# EAGLE board MARI_BRD (EAGLE 9.7.0)
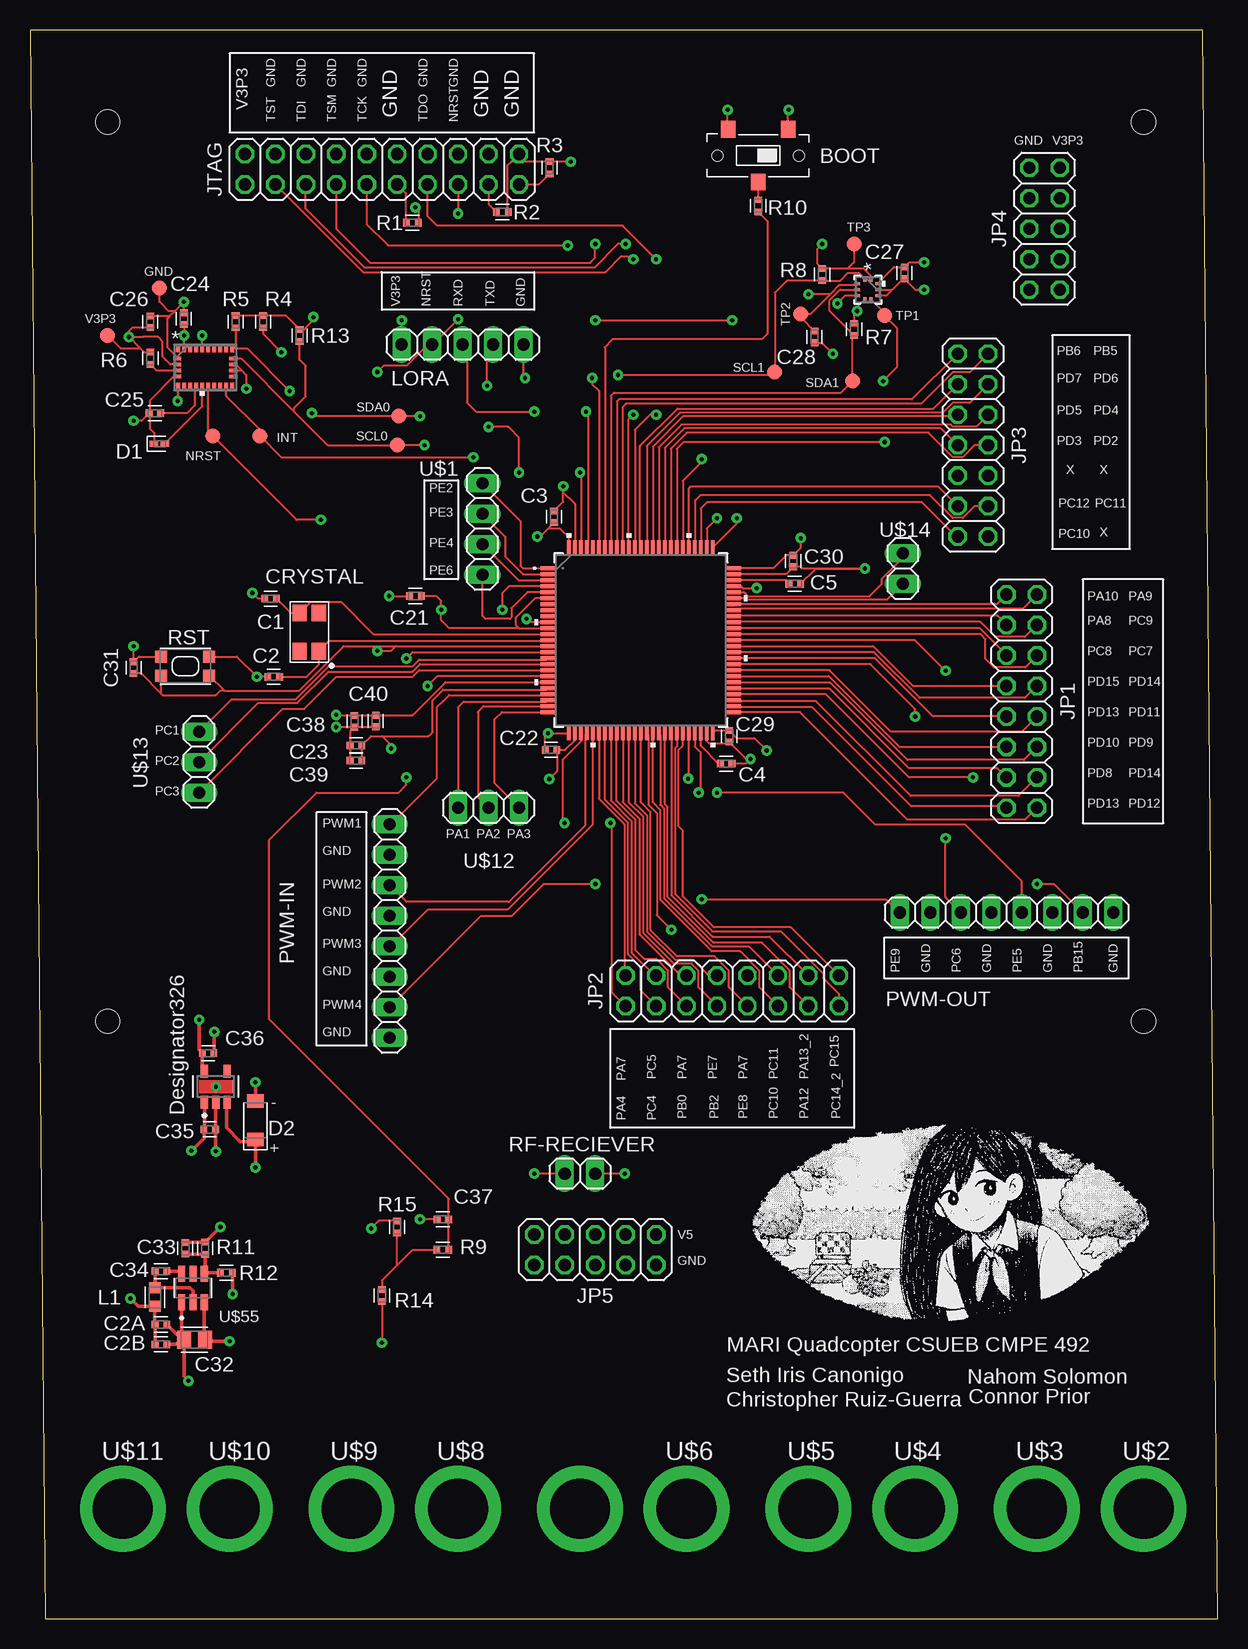
[diagram p0: board, top side]
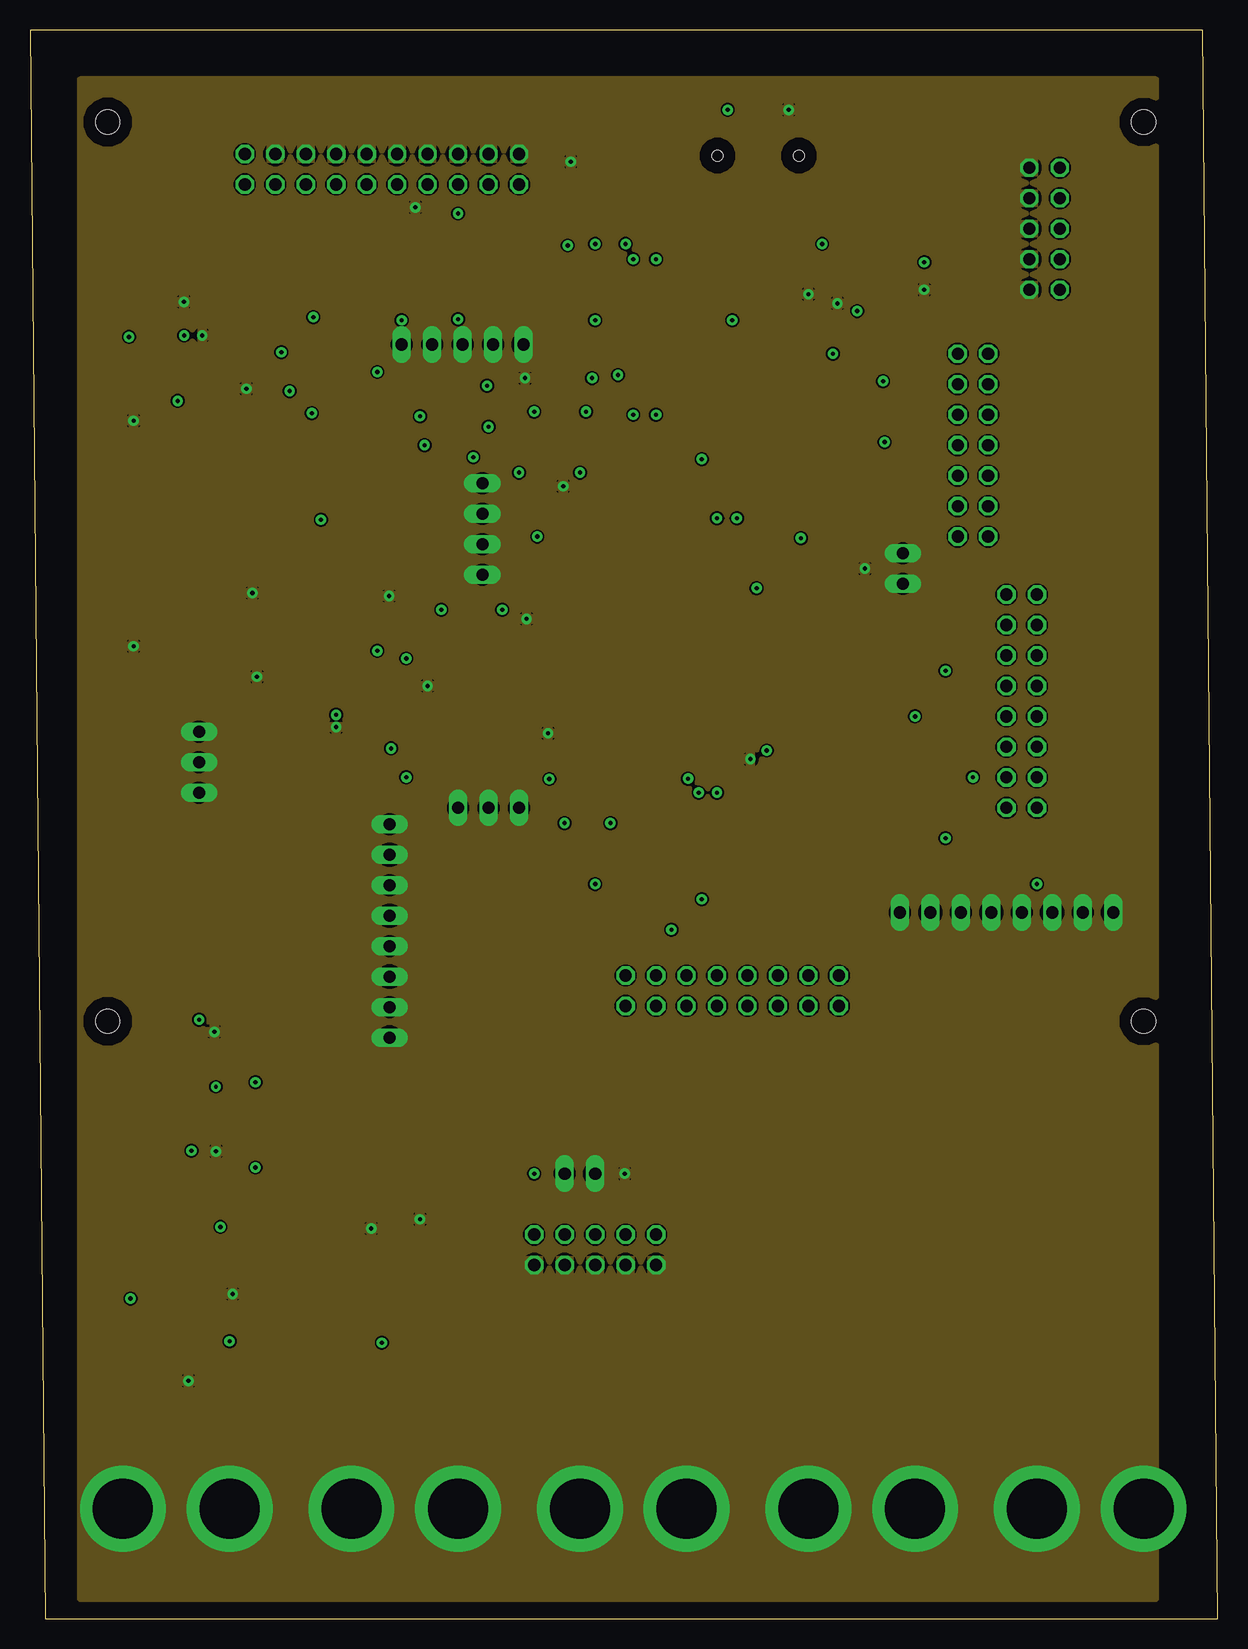
[diagram p1: board, inner layer GND]
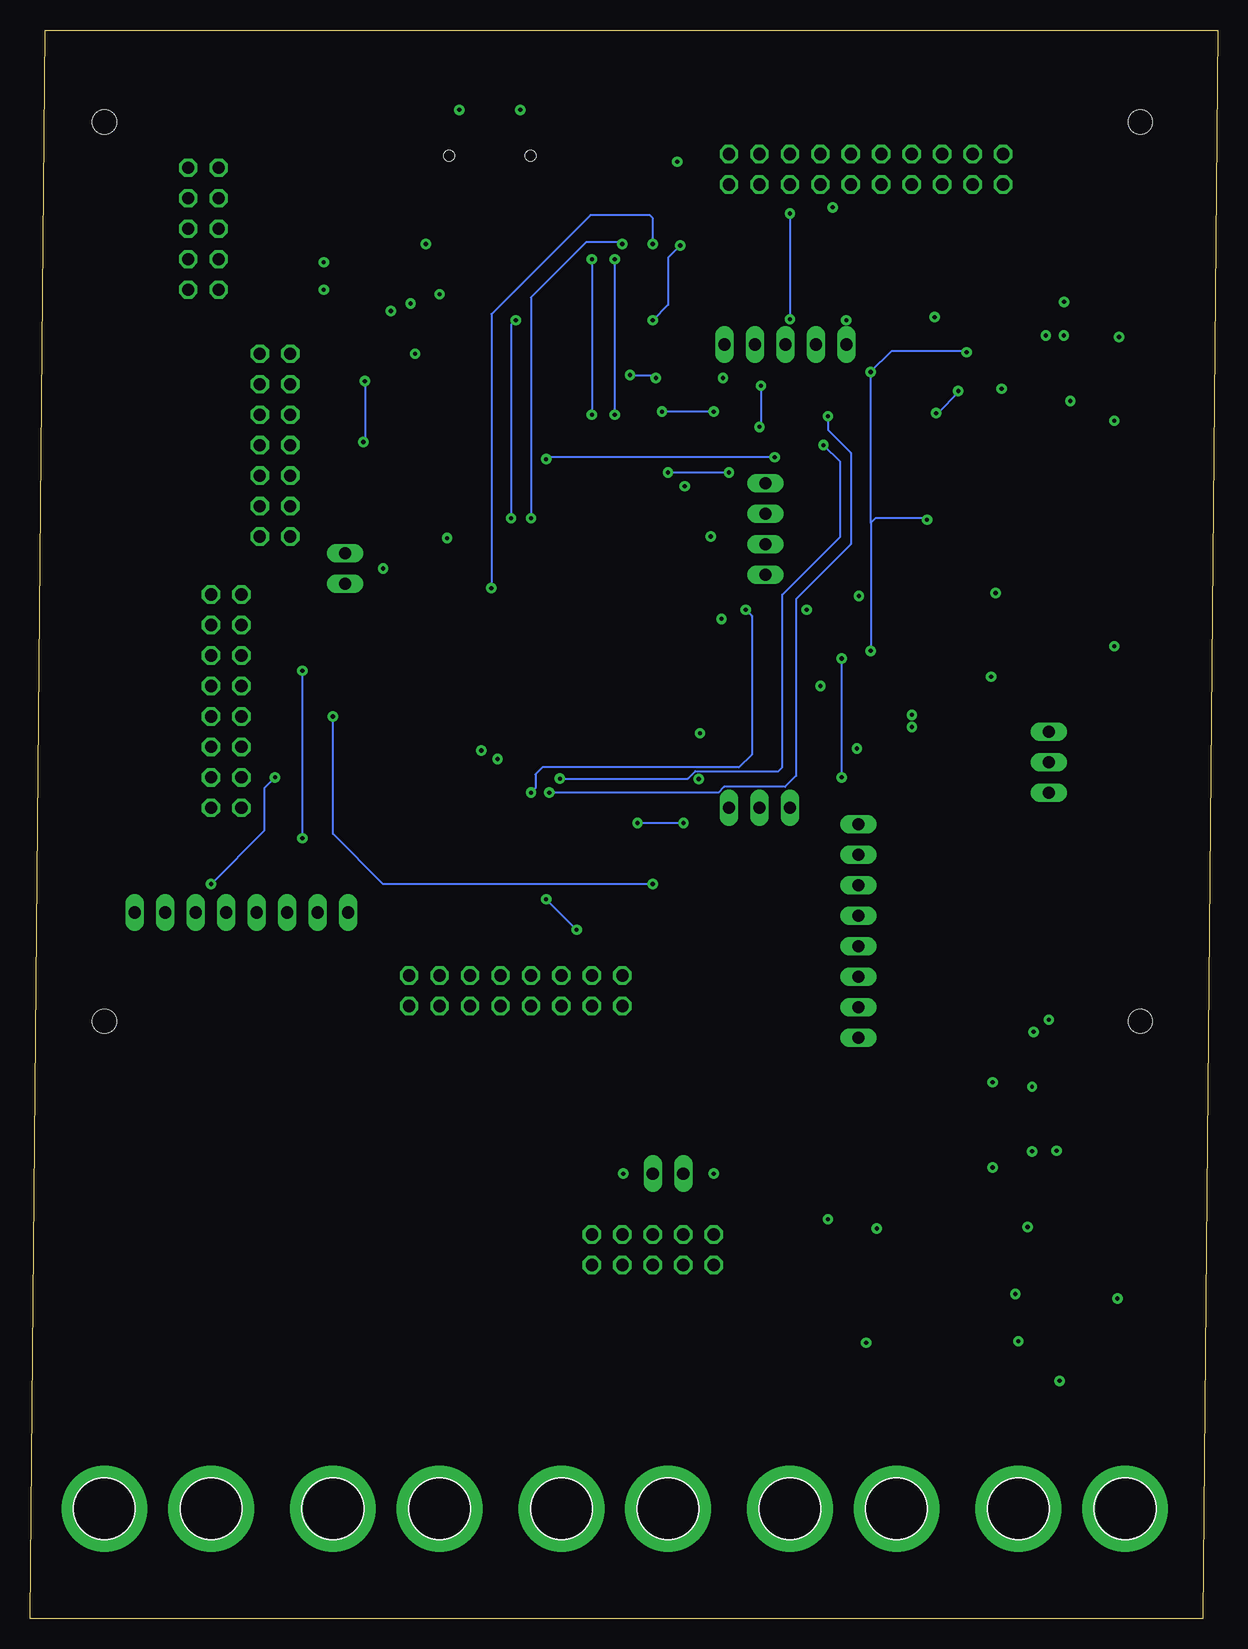
[diagram p2: board, bottom side, seen from below]

Size 99.04 x 132.38 mm. Coordinates in mm from the lower left corner, seen from the top.
Outline: 1.27,0 99.04,0 97.77,132.38 0,132.38 1.27,0
Copper layers (1*2*63*16): Top / GND / Bottom / layer 63
Stack-up Default Layer Stack: Top User Defined 0.035559375mm / Dielectric-2 User Defined 1.5748mm / GND User Defined 0.035559375mm / Dielectric-1 User Defined 1.5748mm / VDD User Defined 0.035559375mm / Dielectric-3 User Defined 1.5748mm / Bottom User Defined 0.035559375mm
Design rules: minimum copper width 6mil, minimum drill size 8mil, copper clearance wire_polygon to wire_polygon 6mil, copper clearance wire_polygon to pad_smd 6mil, copper clearance wire_polygon to via 6mil, copper clearance pad_smd to pad_smd 6mil, copper clearance pad_smd to via 6mil, copper clearance via to via 6mil, copper clearance smd to pad (same net) 6mil, copper clearance smd to via (same net) 6mil, copper clearance smd to smd (same net) 6mil, dimension clearance 40mil, via restrict clearance 0mil, restrict clearance 0mil, drill distance 20mil, keepout clearance 0mil
Holes 2 mm at 92.84,124.71 6.48,124.71 6.48,49.78 92.84,49.78

## Footprints (pad centres in the part's own frame; a part is rotated, then mirrored left to right if it is on the bottom)
10LGA_2X2X0P75_BOS = smd 0.279 x 0.254: 1 -0.787,0.25; 2 -0.787,-0.25; 6 0.787,-0.25; 7 0.787,0.25 | smd 0.254 x 0.279: 3 -0.5,-0.787; 4 0,-0.787; 5 0.5,-0.787; 8 0.5,0.787; 9 0,0.787; 10 -0.5,0.787
CL-SB-12B-01T = smd 1.2 x 1.4: 1 -2.5,-2.2; 3 2.5,-2.2; C 0,2.2 | hole 0.9: -3.4,0; 3.4,0
CAPC1005X60 = smd 0.56 x 0.629: 1 -0.485,0; 2 0.485,0
CAPC2012X110 = smd 1.165 x 1.465: 1 -0.875,0; 2 0.875,0
STDCRG1-16M = smd 1.4 x 1.2: P$1 -2.2,-1.6; P$2 1,-1.6; P$3 1,0; P$4 -2.2,0
LEDC1005X25N_FLAT-R = smd 0.7 x 0.5: A 0.45,0; C -0.45,0
SODFL3718X115 = smd 1.115 x 1.361: 1 -1.6,0; 2 1.6,0
B1,27 = smd 1.27 x 1.27: TP 0,0
2X08 = drill 1.016 octagon: 1 -8.89,-1.27; 2 -8.89,1.27; 3 -6.35,-1.27; 4 -6.35,1.27; 5 -3.81,-1.27; 6 -3.81,1.27; 7 -1.27,-1.27; 8 -1.27,1.27; 9 1.27,-1.27; 10 1.27,1.27; 11 3.81,-1.27; 12 3.81,1.27; 13 6.35,-1.27; 14 6.35,1.27; 15 8.89,-1.27; 16 8.89,1.27
2X07 = drill 1.016 octagon: 1 -7.62,-1.27; 2 -7.62,1.27; 3 -5.08,-1.27; 4 -5.08,1.27; 5 -2.54,-1.27; 6 -2.54,1.27; 7 0,-1.27; 8 0,1.27; 9 2.54,-1.27; 10 2.54,1.27; 11 5.08,-1.27; 12 5.08,1.27; 13 7.62,-1.27; 14 7.62,1.27
2X05 = drill 1.016 octagon: 1 -5.08,-1.27; 2 -5.08,1.27; 3 -2.54,-1.27; 4 -2.54,1.27; 5 0,-1.27; 6 0,1.27; 7 2.54,-1.27; 8 2.54,1.27; 9 5.08,-1.27; 10 5.08,1.27
2X10 = drill 1.016 octagon: 1 -11.43,-1.27; 2 -11.43,1.27; 3 -8.89,-1.27; 4 -8.89,1.27; 5 -6.35,-1.27; 6 -6.35,1.27; 7 -3.81,-1.27; 8 -3.81,1.27; 9 -1.27,-1.27; 10 -1.27,1.27; 11 1.27,-1.27; 12 1.27,1.27; 13 3.81,-1.27; 14 3.81,1.27; 15 6.35,-1.27; 16 6.35,1.27; 17 8.89,-1.27; 18 8.89,1.27; 19 11.43,-1.27; 20 11.43,1.27
INDC1608X95N = smd 0.9 x 0.97: 1 -0.785,0 | smd 0.933 x 0.97: 2 0.769,0
1X05 = drill 1.016 long: 1 -5.08,0; 2 -2.54,0; 3 0,0; 4 2.54,0; 5 5.08,0
1X08 = drill 1.016 long: 1 -8.89,0; 2 -6.35,0; 3 -3.81,0; 4 -1.27,0; 5 1.27,0; 6 3.81,0; 7 6.35,0; 8 8.89,0
RESC1005X40 = smd 0.535 x 0.644: 1 -0.507,0; 2 0.507,0
1X02 = drill 1.016 long: 1 -1.27,0; 2 1.27,0
KMR2 = smd 1 x 1: 1 2,0.8; 2 2,-0.8; 3 -2,-0.8; 4 -2,0.8
QFN_BNO055_BOS = smd 0.305 x 0.533: 1 -2.25,1.537; 6 -2.25,-1.537; 7 -1.75,-1.537; 8 -1.25,-1.537; 9 -0.75,-1.537; 10 -0.25,-1.537; 11 0.25,-1.537; 12 0.75,-1.537; 13 1.25,-1.537; 14 1.75,-1.537; 15 2.25,-1.537; 20 2.25,1.537; 21 1.75,1.537; 22 1.25,1.537; 23 0.75,1.537; 24 0.25,1.537; 25 -0.25,1.537; 26 -0.75,1.537; 27 -1.25,1.537; 28 -1.75,1.537 | smd 0.432 x 0.305: 2 -2.235,0.75; 3 -2.235,0.25; 4 -2.235,-0.25; 5 -2.235,-0.75; 16 2.235,-0.75; 17 2.235,-0.25; 18 2.235,0.25; 19 2.235,0.75
LQFP-100_14X14MM_STM = smd 1.2 x 0.3: 1 -7.75,6; 2 -7.75,5.5; 3 -7.75,5; 4 -7.75,4.5; 5 -7.75,4; 6 -7.75,3.5; 7 -7.75,3; 8 -7.75,2.5; 9 -7.75,2; 10 -7.75,1.5; 11 -7.75,1; 12 -7.75,0.5; 13 -7.75,0; 14 -7.75,-0.5; 15 -7.75,-1; 16 -7.75,-1.5; 17 -7.75,-2; 18 -7.75,-2.5; 19 -7.75,-3; 20 -7.75,-3.5; 21 -7.75,-4; 22 -7.75,-4.5; 23 -7.75,-5; 24 -7.75,-5.5; 25 -7.75,-6; 51 7.75,-6; 52 7.75,-5.5; 53 7.75,-5; 54 7.75,-4.5; 55 7.75,-4; 56 7.75,-3.5; 57 7.75,-3; 58 7.75,-2.5; 59 7.75,-2; 60 7.75,-1.5; 61 7.75,-1; 62 7.75,-0.5; 63 7.75,0; 64 7.75,0.5; 65 7.75,1; 66 7.75,1.5; 67 7.75,2; 68 7.75,2.5; 69 7.75,3; 70 7.75,3.5; 71 7.75,4; 72 7.75,4.5; 73 7.75,5; 74 7.75,5.5; 75 7.75,6 | smd 0.3 x 1.2: 26 -6,-7.75; 27 -5.5,-7.75; 28 -5,-7.75; 29 -4.5,-7.75; 30 -4,-7.75; 31 -3.5,-7.75; 32 -3,-7.75; 33 -2.5,-7.75; 34 -2,-7.75; 35 -1.5,-7.75; 36 -1,-7.75; 37 -0.5,-7.75; 38 0,-7.75; 39 0.5,-7.75; 40 1,-7.75; 41 1.5,-7.75; 42 2,-7.75; 43 2.5,-7.75; 44 3,-7.75; 45 3.5,-7.75; 46 4,-7.75; 47 4.5,-7.75; 48 5,-7.75; 49 5.5,-7.75; 50 6,-7.75; 76 6,7.75; 77 5.5,7.75; 78 5,7.75; 79 4.5,7.75; 80 4,7.75; 81 3.5,7.75; 82 3,7.75; 83 2.5,7.75; 84 2,7.75; 85 1.5,7.75; 86 1,7.75; 87 0.5,7.75; 88 0,7.75; 89 -0.5,7.75; 90 -1,7.75; 91 -1.5,7.75; 92 -2,7.75; 93 -2.5,7.75; 94 -3,7.75; 95 -3.5,7.75; 96 -4,7.75; 97 -4.5,7.75; 98 -5,7.75; 99 -5.5,7.75; 100 -6,7.75
DYD0005A-MFG = smd 1.1 x 0.6: 1 -1.3,0.95; 2 -1.3,0; 3 -1.3,-0.95; 4 1.3,-0.95; 5 1.3,0.95 | drill 0.3 pad 0.813: 8 0,0
1X04 = drill 1.016 long: 1 -3.81,0; 2 -1.27,0; 3 1.27,0; 4 3.81,0
4MM_PLUG = drill 5 pad 7.15: P$1 0,-1.27
1X03 = drill 1.016 long: 1 -2.54,0; 2 0,0; 3 2.54,0
SOT95P280X100-6N = smd 1.34 x 0.59: 1 -1.19,0.95; 2 -1.19,0; 3 -1.19,-0.95; 4 1.19,-0.95; 5 1.19,0; 6 1.19,0.95

## Placement (x,y rotation side)
BMP390  BMP39010LGA_2X2X0P75_BOS  [10LGA_2X2X0P75_BOS]  69.85,110.74 270 top
BOOT  SPDT_SWITCH_CL-SB-12B-01T  [CL-SB-12B-01T]  60.71,121.92 180 top
C1  15pF  [CAPC1005X60]  20.07,84.99 180 top
C2  15pF  [CAPC1005X60]  20.32,78.49 180 top
C2A  22 µF  [CAPC1005X60]  10.92,24.51 0 top
C2B  22 µF  [CAPC1005X60]  10.92,22.86 0 top
C3  100nF  [CAPC1005X60]  43.69,91.82 90 top
C4  2.2uF  [CAPC1005X60]  58.04,71.25 0 top
C5  2.2uF  [CAPC1005X60]  63.75,86.23 0 top
C21  100nF  [CAPC1005X60]  32.13,85.22 180 top
C22  100nF  [CAPC1005X60]  43.43,72.39 180 top
C23  1uF  [CAPC1005X60]  27.18,72.77 0 top
C24  120 nF  [CAPC1005X60]  12.83,108.33 270 top
C25  1uF  [CAPC1005X60]  10.41,100.46 0 top
C26  100nF  [CAPC1005X60]  10.03,108.08 270 top
C27  100nF  [CAPC1005X60]  72.9,112.14 90 top
C28  100nF  [CAPC1005X60]  65.41,106.81 270 top
C29  100nF  [CAPC1005X60]  58.29,73.53 270 top
C30  100nF  [CAPC1005X60]  63.63,88.14 270 top
C31  100nF  [CAPC1005X60]  8.64,79.25 90 top
C32  10 uF  [CAPC2012X110]  13.72,23.24 0 top
C33  100 pF  [CAPC1005X60]  12.95,30.86 90 top
C34  100 nF  [CAPC1005X60]  10.92,28.96 0 top
C35  1 µF  [CAPC1005X60]  14.99,40.77 180 top
C36  1 µF  [CAPC1005X60]  14.86,47.12 180 top
C37  100 nF  [CAPC1005X60]  34.42,33.27 180 top
C38  100nF  [CAPC1005X60]  27.05,74.77 270 top
C39  100nF  [CAPC1005X60]  27.18,71.5 0 top
C40  1uF  [CAPC1005X60]  28.83,74.8 90 top
CRYSTAL  16 MHz  [STDCRG1-16M]  22.48,82.8 90 top
D1  CHIP-FLAT-R_0402  [LEDC1005X25N_FLAT-R]  10.8,97.92 0 top
D2  SCHOTTKY_MBR0520LT1GDO-219  [SODFL3718X115]  18.8,41.53 90 top
GND  TPB1,27  [B1,27]  10.8,110.87 0 top
INT  TPB1,27  [B1,27]  19.18,98.55 0 top
JP1  PINHD-2X8  [2X08]  82.68,76.45 90 top
JP2  PINHD-2X8  [2X08]  58.55,52.32 0 top
JP3  PINHD-2X7  [2X07]  78.61,97.79 270 top
JP4  PINHD-2X5  [2X05]  84.58,115.82 90 top
JP5  PINHD-2X5  [2X05]  47.12,30.73 180 top
JTAG  PINHD-2X10  [2X10]  29.34,120.78 0 top
L1  3.3 µH  [INDC1608X95N]  10.41,26.8 270 top
LORA  FEMALE-HEADER-1X5  [1X05]  36.07,106.17 0 top
NRST  TPB1,27  [B1,27]  15.24,98.55 0 top
PWM-IN  PINHD-1X08_1X08M  [1X08]  29.98,57.31 270 top
PWM-OUT  PINHD-1X08_1X08M  [1X08]  81.41,58.84 0 top
R1  10K  [RESC1005X40]  31.88,116.33 0 top
R2  10K  [RESC1005X40]  39.37,117.22 0 top
R3  10K  [RESC1005X40]  43.31,120.9 90 top
R4  10K  [RESC1005X40]  19.43,108.08 90 top
R5  40K  [RESC1005X40]  17.15,108.08 90 top
R6  10K  [RESC1005X40]  10.03,105.03 270 top
R7  4.7K  [RESC1005X40]  68.71,107.44 270 top
R8  4.7K  [RESC1005X40]  66.04,112.01 270 top
R9  1 kΩ  [RESC1005X40]  34.42,30.73 0 top
R10  10k  [RESC1005X40]  60.71,117.73 90 top
R11  56.2 kΩ  [RESC1005X40]  14.61,30.86 90 top
R12  10 kΩ  [RESC1005X40]  16.38,28.83 180 top
R13  40K  [RESC1005X40]  22.48,106.93 90 top
R14  47.5 kΩ  [RESC1005X40]  29.34,26.92 270 top
R15  4.99 kΩ  [RESC1005X40]  30.61,32.64 270 top
RF-RECIEVER  PINHD-1X02_1X02M  [1X02]  45.85,37.08 0 top
RST  SPST-NO_SWITCH_KMR2  [KMR2]  12.95,79.38 0 top
SCL0  TPB1,27  [B1,27]  30.61,97.79 0 top
SCL1  TPB1,27  [B1,27]  62.1,103.89 0 top
SDA0  TPB1,27  [B1,27]  30.76,100.2 0 top
SDA1  TPB1,27  [B1,27]  68.58,103.12 0 top
TP1  TPB1,27  [B1,27]  71.25,108.58 0 top
TP2  TPB1,27  [B1,27]  64.26,108.71 0 top
TP3  TPB1,27  [B1,27]  68.71,114.55 0 top
U1  [QFN_BNO055_BOS]  14.61,104.27 0 top
U3  STM32F756VGT6LQFP-100_14X14MM_STM  [LQFP-100_14X14MM_STM]  50.93,81.53 0 top
U33  TLV75533PDYDRDYD0005A-MFG  [DYD0005A-MFG]  15.49,44.32 90 top
U$1  PINHD-1X04_1X04M  [1X04]  37.72,90.8 270 top
U$2  VDD  [4MM_PLUG]  92.84,7.87 180 bottom
U$3  VSS  [4MM_PLUG]  83.95,7.87 180 bottom
U$4  VDD  [4MM_PLUG]  73.79,7.87 180 bottom
U$5  VSS  [4MM_PLUG]  64.9,7.87 180 bottom
U$6  VDD  [4MM_PLUG]  54.74,7.87 180 bottom
U$7  VSS  [4MM_PLUG]  45.85,7.87 180 bottom
U$8  VDD  [4MM_PLUG]  35.69,7.87 180 bottom
U$9  VSS  [4MM_PLUG]  26.8,7.87 180 bottom
U$10  VDD  [4MM_PLUG]  16.64,7.87 180 bottom
U$11  VSS  [4MM_PLUG]  7.75,7.87 180 bottom
U$12  PINHD-1X03_1X03M  [1X03]  38.23,67.56 0 top
U$13  PINHD-1X03_1X03M  [1X03]  14.1,71.37 270 top
U$14  PINHD-1X02_1X02M  [1X02]  72.77,87.5 270 top
U$55  AP62300TWU-7  [SOT95P280X100-6N]  13.59,27.56 90 top
V3P3  TPB1,27  [B1,27]  6.48,106.93 0 top

## Library data of the parts
BMP390 = BMP390; COPYRIGHT: Copyright (C) 2025 Ultra Librarian. All rights reserved.; MANUFACTURER_NAME: Bosch Sensortec; MANUFACTURER_PART_NUMBER: BMP390
BOOT = Switch; CATEGORY: Switches; DATASHEET: https://www.nidec-components.com/e/catalog/switch/cl-sb.pdf; DESCRIPTION: Slide Switch SPDT Surface Mount; MANUFACTURER: Nidec Components Corporation; MPN: CL-SB-12B-01T; OPERATING_TEMPERATURE: -40°C ~ 85°C; PACKAGE_SIZE: NA; PACKAGE_TYPE: Surface Mount; PART_STATUS: Active; ROHS: Compliant; SERIES: CL-SB; SUBCATEGORY: Slide Switches; TYPE: SPDT
C1 C2 C2A C2B C3-C5 C21-C31 C33-C40 = Capacitor; CATEGORY: Capacitor; PACKAGE_SIZE: 0402; PACKAGE_TYPE: Surface Mount; SUBCATEGORY: Ceramic Capacitors; TYPE: MLCC
C32 = Capacitor; CATEGORY: Capacitor; PACKAGE_SIZE: 0805; PACKAGE_TYPE: Surface Mount; SUBCATEGORY: Ceramic Capacitors; TYPE: MLCC
CRYSTAL = STDCRG1-16M
D1 = LED; CATEGORY: LED; COLOR: Red; DESCRIPTION: Red LED Indication 0402 (1005 Metric); PACKAGE_SIZE: 0402; PACKAGE_TYPE: Surface Mount; SUBCATEGORY: Chip LED; TYPE: Square with Flat Top
D2 = Diode; CATEGORY: Diode; DATASHEET: https://www.onsemi.com/download/data-sheet/pdf/mbr0520lt1-d.pdf; DESCRIPTION: Diode 20 V 500mA Surface Mount SOD-123; FORWARD_CURRENT: 500mA; FORWARD_VOLTAGE: 385mV; MANUFACTURER: onsemi; MPN: MBR0520LT1G; OPERATING_TEMPERATURE: -65°C ~ 125°C; PACKAGE_SIZE: SOD-123; PACKAGE_TYPE: Surface Mount; PART_STATUS: Active; REVERSE_VOLTAGE: 20V; ROHS: Compliant; SERIES: MBR0520; SUBCATEGORY: Schottky Diodes; TYPE: Schottky Power Rectifier; ZENER_VOLTAGE: NA
GND INT NRST SCL0 SCL1 SDA0 SDA1 TP1-TP3 V3P3 = testpad
JP1 JP2 = Connector; CATEGORY: Connectors; DESCRIPTION: Header-Straight-2x8 Position; PACKAGE_TYPE: Through Hole; PITCH: 0.100" (2.54mm); SUBCATEGORY: Headers; TYPE: Male Pins
JP3 = Connector; CATEGORY: Connectors; DESCRIPTION: Header-Straight-2x7 Position; PACKAGE_TYPE: Through Hole; PITCH: 0.100" (2.54mm); SUBCATEGORY: Headers; TYPE: Male Pins
JP4 JP5 = Connector; CATEGORY: Connectors; DESCRIPTION: Header-Straight-2x5 Position; PACKAGE_TYPE: Through Hole; PITCH: 0.100" (2.54mm); SUBCATEGORY: Headers; TYPE: Male Pins
JTAG = Connector; CATEGORY: Connectors; DESCRIPTION: Header-Straight-2x10 Position; PACKAGE_TYPE: Through Hole; PITCH: 0.100" (2.54mm); SUBCATEGORY: Headers; TYPE: Male Pins
L1 = Inductor; CATEGORY: Inductors; DESCRIPTION: Chip 1.60 X 0.80 X 0.95 mm body 0603(1608-METRIC); PACKAGE_SIZE: 0603; PACKAGE_TYPE: Surface Mount
LORA = Connector; CATEGORY: Connectors; DESCRIPTION: Female Header-Straight-5 Position; PACKAGE_SIZE: NA; PACKAGE_TYPE: Through Hole; PITCH: 0.100" (2.54mm); SUBCATEGORY: Headers-Female Pins
PWM-IN PWM-OUT RF-RECIEVER U$1 U$12-U$14 = Tinkercad
R1-R15 = Resistor; CATEGORY: Resistors; DESCRIPTION: Chip Resistor 1.05 X 0.54 X 0.40 mm body 0402(1005-METRIC) Package; PACKAGE_SIZE: 0402; PACKAGE_TYPE: Surface Mount
RST = Switch; CATEGORY: Switches; DATASHEET: https://www.ckswitches.com/media/1479/kmr2.pdf; DESCRIPTION: Tactile Switch SPST-NO Top Actuated Surface Mount; MANUFACTURER: C&K; MPN: KMR211G LFS; OPERATING_TEMPERATURE: -40°C ~ 85°C; PACKAGE_SIZE: NA; PACKAGE_TYPE: Surface Mount; PART_STATUS: Active; ROHS: Compliant; SERIES: KMR2; SUBCATEGORY: Tactile Switches; TYPE: SPST-NO
U1 = BNO055; COPYRIGHT: Copyright (C) 2025 Ultra Librarian. All rights reserved.; MANUFACTURER_NAME: Bosch Sensortec; MANUFACTURER_PART_NUMBER: BNO055
U3 = STM32F756VGT6; COPYRIGHT: Copyright (C) 2025 Ultra Librarian. All rights reserved.; DATASHEET: https://www.st.com/resource/en/datasheet/stm32f756bg.pdf; DESCRIPTION: High-performance and DSP with FPU, Arm Cortex-M7 MCU with 1 Mbyte of Flash memory, 216 MHz CPU, Art Accelerator, L1 cache, HW crypto, SDRAM, TFT; MANUFACTURER_NAME: STMicroelectronics; MANUFACTURER_PART_NUMBER: STM32F756VGT6
U33 = TLV75533PDYDR; COPYRIGHT: Copyright (C) 2025 Ultra Librarian. All rights reserved.; DATASHEET: https://www.ti.com/lit/gpn/tlv755p; DESCRIPTION: 500mA high-PSRR low-I<sub>Q</sub> low-dropout voltage regulator with enable 5-SOT-23 -40 to 125; MANUFACTURER_NAME: Texas Instruments; MANUFACTURER_PART_NUMBER: TLV75533PDYDR; REFDES: RefDes; TYPE: TYPE
U$2-U$11 = 4mm Banana Plug female
U$55 = Buck - AP62300TWU-7; MANUFACTURER: Diodes Inc.; MAXIMUM_PACKAGE_HEIGHT: 1.0mm; PARTREV: Rev. 3 - 2; SNAPEDA_PN: AP62300TWU-7; STANDARD: IPC 7351B

## Nets
BL_IND: D1.A U1.10
BOOT: R6.2 U1.4
GND: BMP390.3 BMP390.5 BMP390.8 BMP390.9 BOOT.1 C1.2 C2.2 C2A.2 C2B.2 C3.2 C4.2 C5.2 C21.2 C22.2 C23.1 C24.1 C25.1 C26.1 C27.1 C28.1 C29.2 C30.2 C31.2 C32.1 C35.1 C36.1 C37.2 C38.2 C39.1 C40.1 D1.C GND.TP JP4.2 JP4.4 JP4.6 JP4.8 JP4.10 JP5.2 JP5.4 JP5.6 JP5.8 JP5.10 JTAG.4 JTAG.6 JTAG.8 JTAG.10 JTAG.12 JTAG.14 JTAG.16 JTAG.18 JTAG.20 LORA.5 PWM-IN.2 PWM-IN.4 PWM-IN.6 PWM-IN.8 PWM-OUT.2 PWM-OUT.4 PWM-OUT.6 PWM-OUT.8 R1.2 R2.2 R3.2 R12.1 R15.1 RF-RECIEVER.2 RST.1 RST.4 TP2.TP U1.2 U1.5 U1.17 U1.18 U1.25 U3.10 U3.19 U3.26 U3.49 U3.74 U3.99 U33.2 U$3.P$1 U$5.P$1 U$7.P$1 U$9.P$1 U$11.P$1 U$55.1
MONITORING: C37.1 R9.2 U3.15
N$9: C33.1 R11.1 R12.2 U$55.4
N$15: C25.2 U1.9
N$17: JTAG.11 R1.1
N$18: C1.1 CRYSTAL.P$3 U3.12
N$19: JTAG.17 R2.1
N$20: JTAG.19 R3.1
N$21: C2.1 CRYSTAL.P$1 U3.13
N$23: C4.1 U3.48
N$24: C5.1 U3.73
N$25: R10.1 U3.94
N$26: BOOT.C R10.2
N$31: R9.1 R14.1 R15.2
NRESET: C31.1 JTAG.15 LORA.2 NRST.TP R4.1 RST.2 RST.3 U1.11 U3.14
PA0: PWM-IN.1 U3.22
PA1: U3.23 U$12.1
PA2: U3.24 U$12.2
PA3: U3.25 U$12.3
PA4: JP2.1 U3.28
PA5: PWM-IN.3 U3.29
PA6: PWM-IN.5 U3.30
PA7: JP2.2 U3.31
PA8: JP1.14 U3.67
PA9: JP1.15 U3.68
PA10: JP1.16 U3.69
PA11: U3.70 U$14.2
PA12: U3.71 U$14.1
PB0: JP2.5 U3.34
PB1: JP2.6 U3.35
PB2: JP2.7 U3.36
PB5: JP3.2 U3.91
PB6: JP3.1 U3.92
PB12: JP1.1 U3.51
PB13: JP1.2 U3.52
PB13_2: JP2.14 U3.43
PB14: JP1.3 U3.53
PB14_2: JP2.15 U3.44
PB15: PWM-OUT.7 U3.54
PC1: U3.16 U$13.1
PC2: U3.17 U$13.2
PC3: U3.18 U$13.3
PC4: JP2.3 U3.32
PC5: JP2.4 U3.33
PC6: PWM-OUT.3 U3.63
PC7: JP1.11 U3.64
PC8: JP1.12 U3.65
PC9: JP1.13 U3.66
PC10: JP3.13 U3.78
PC11: JP3.12 U3.79
PC12: JP3.11 U3.80
PD0: INT.TP U1.14 U3.81
PD1: BMP390.7 TP1.TP U3.82
PD2: JP3.8 U3.83
PD3: JP3.7 U3.84
PD4: JP3.6 U3.85
PD5: JP3.5 U3.86
PD6: JP3.4 U3.87
PD7: JP3.3 U3.88
PD8: JP1.4 U3.55
PD9: JP1.5 U3.56
PD10: JP1.6 U3.57
PD11: JP1.7 U3.58
PD12: PWM-IN.7 U3.59
PD13: JP1.8 U3.60
PD14: JP1.9 U3.61
PD15: JP1.10 U3.62
PE2: U3.1 U$1.1
PE3: U3.2 U$1.2
PE4: U3.3 U$1.3
PE5: PWM-OUT.5 U3.4
PE6: U3.5 U$1.4
PE7: JP2.8 U3.37
PE8: JP2.9 U3.38
PE9: PWM-OUT.1 U3.39
PE10: JP2.11 U3.40
PE11: JP2.12 U3.41
PE12: JP2.13 U3.42
PE15: JP2.16 U3.45
RXD: LORA.3 U3.97
SCL: R13.1 SCL0.TP U1.19 U3.46
SCL1: BMP390.2 R8.2 SCL1.TP U3.95
SDA1: BMP390.4 R7.2 SDA1.TP U3.93
SDA/BNO: R5.1 SDA0.TP U1.20 U3.47
SW: C34.1 L1.1 U$55.2
TCK/SWCLK: JTAG.9 U3.76
TDI: JTAG.5 U3.77
TDO/SWO: JTAG.13 U3.89
TMP: C34.2 U$55.6
TRST: JTAG.3 U3.90
TSM/SWDIO: JTAG.7 U3.72
TXD: LORA.4 U3.98
V3P3: BMP390.1 BMP390.6 BMP390.10 BOOT.3 C3.1 C21.1 C22.1 C23.2 C24.2 C26.2 C27.2 C28.2 C29.1 C30.1 C36.2 C38.1 C39.2 C40.2 D2.2 JP4.1 JP4.3 JP4.5 JP4.7 JP4.9 JTAG.1 JTAG.2 LORA.1 R4.2 R5.2 R6.1 R7.1 R8.1 R13.2 TP3.TP U1.3 U1.6 U1.28 U3.6 U3.11 U3.20 U3.21 U3.27 U3.50 U3.75 U3.100 U33.5 V3P3.TP
V5: C2A.1 C2B.1 C33.2 C35.2 D2.1 JP5.1 JP5.3 JP5.5 JP5.7 JP5.9 L1.2 R11.2 RF-RECIEVER.1 U33.1 U33.3
V14P8: C32.2 R14.2 U$2.P$1 U$4.P$1 U$6.P$1 U$8.P$1 U$10.P$1 U$55.3

## Tracks (layer width: path | path; a pad name or v marks a point on that pad's centre or on a via)
BL_IND
  Top 0.152: D1.A 14.36,101.03 U1.10
BOOT
  Top 0.152: R6.2 10.54,104.02 U1.4
GND  (via drill 0.35)
  Top 0.152: R15.1 | R15.1 29.08,33.15 v28.45,32.51 | C37.2 v32.51,33.27 | BMP390.9 71.88,110.74 | 71.88,110.74 72.79,111.66 C27.1 73.81,110.74 v74.55,110.74 | BMP390.8 71.38,110.24 71.88,110.74 | U1.25 v14.35,106.93 | C24.1 v12.83,109.73 12.06,108.97 | 11.66,108.56 11.43,108.33 11.43,105.96 U1.2 | 11.66,108.56 12.06,108.97 | U1.5 11.99,103.52 9.98,101.51 9.98,100.51 | 9.98,100.51 C25.1 9.29,99.82 v8.64,99.82 | 9.98,100.51 9.98,99.17 10.34,98.81 D1.C | U3.74 63.01,87.03 C30.2 64.26,87.65 64.41,87.5 v69.6,87.5 65.51,87.5 C5.2 | C40.1 27.08,74.32 C38.2 | C38.2 v25.53,74.29 v25.53,74.3 | C38.2 26.69,73.93 C23.1 C39.1 | R2.2 39.78,117.32 39.78,121.06 40.13,121.41 | 40.13,121.41 JTAG.20 | R1.2 32.38,117.35 v32.13,117.6 | RST.4 9.08,80.17 C31.2 v8.64,81.03 | BOOT.1 63.21,125.69 v63.25,125.73 | v49.58,37.08 RF-RECIEVER.2 | v41.28,103.38 41.15,103.5 LORA.5 | U3.99 45.43,92.91 44.45,93.88 | 44.45,93.88 v44.45,94.36 | v43.18,73.78 U3.26 | v43.18,73.78 v43.18,73.79 | U3.49 56.43,73.11 56.59,72.95 58.19,72.95 C29.2 59.71,71.63 v60.07,71.63 59.69,71.25 C4.2 | v29.93,85.22 C21.2 | C2.2 v18.92,78.49 17.23,80.17 RST.1 | C1.2 19.02,84.99 v18.54,85.47 | C26.1 11.66,108.56 | U3.10 41.68,83.03 v41.4,83.31 | U3.19 33.96,78.53 v33.15,77.72 | C22.2 42.95,73.55 v43.18,73.78 | 40.13,121.41 R3.2 v45.09,121.41 | C3.2 44.45,93.07 44.45,93.88 | GND.TP 10.8,109.73 11.56,108.97 12.06,108.97 | BMP390.5 67.95,110.24 v67.31,109.6 | BMP390.3 68.92,111.1 67.45,111.1 66.71,110.36 | 66.71,110.36 v64.9,110.36 | 66.71,110.36 65.06,108.71 TP2.TP 64.26,108.44 C28.1 | U1.17 17.65,104.02 | 17.65,104.02 18.03,103.63 v18.03,102.49 | U1.18 17.15,104.52 17.65,104.02
  Top 0.305: 12.57,23.24 C32.1 12.84,20.18 v13.21,19.81 | U$55.1 12.64,23.31 | 12.64,23.31 12.57,23.24 | C2A.2 12.61,23.31 12.64,23.31 | C2B.2 12.19,22.86 12.57,23.24 | R12.1 v16.89,27.05 | U33.2 15.49,40.79 C35.1 15.47,38.97 v15.51,38.94 | C36.1 15.34,48.87 v15.37,48.9
  pour GND: 3.94,1.4 94.11,1.4 94.11,128.52 3.94,128.52
MONITORING  (via drill 0.35)
  Top 0.152: R9.2 34.9,30.76 C37.1 34.9,34.98 19.94,49.95 19.94,64.9 23.88,68.83 30.73,68.83 31.37,69.47 v31.37,70.1 | v31.37,80.01 31.89,80.53 U3.15
  Bottom 0.152: v31.37,70.1 v31.37,80.01
N$9
  Top 0.305: C33.1 14.58,30.38 R11.1 14.61,28.81 U$55.4 14.62,28.83 R12.2
N$15
  Top 0.152: C25.2 13.09,100.46 13.74,101.1 13.74,102.61 U1.9
N$17
  Top 0.152: JTAG.11 31.37,118.76 R1.1
N$18
  Top 0.152: U3.12 28.62,82.03 25.92,84.73 23.38,84.73 23.25,84.6 23.25,84.57 CRYSTAL.P$3 21.74,83.8 C1.1
N$19
  Top 0.152: JTAG.17 38.23,117.85 R2.1
N$20
  Top 0.152: JTAG.19 42.42,119.51 R3.1
N$21
  Top 0.152: U3.13 43.07,81.43 24.91,81.43 CRYSTAL.P$1 24.08,79.5 23.28,78.7 23.06,78.49 C2.1
N$23
  Top 0.152: U3.48 55.93,72.72 57.4,71.25 C4.1
N$24
  Top 0.152: C5.1 63.27,86.35 63.09,86.53 U3.73
N$25
  Top 0.152: R10.1 61.47,116.46 61.47,107.06 61.02,106.62 48.58,106.62 47.93,105.97 U3.94
N$26
  Top 0.152: BOOT.C R10.2
N$31
  Top 0.152: R14.1 29.34,28.19 30.61,29.46 | 30.61,29.46 R15.2 | 30.61,29.46 31.88,30.73 R9.1
NRESET  (via drill 0.35)
  Top 0.152: U1.11 14.86,100.84 14.86,98.94 NRST.TP 22.23,91.57 v24.26,91.57 | R4.1 19.43,107.06 v20.96,105.54 | 10.95,77.09 11.08,76.96 15.48,76.96 15.83,77.32 16.21,77.32 | 16.21,77.32 22.42,77.32 26.13,81.03 30.48,81.03 | JTAG.15 v35.69,117.1 v35.69,117.09 | v35.69,108.28 33.58,106.17 LORA.2 33.15,106.17 31.4,104.42 29.49,104.42 v28.96,103.89 | v28.96,80.64 30.09,80.64 30.48,81.03 | 30.48,81.03 U3.14 | 10.95,77.09 RST.3 | 10.95,77.09 9.28,78.76 C31.1 | RST.2 16.21,77.32
  Bottom 0.152: 28.96,91.31 v28.96,80.64 | 28.96,91.31 v28.96,103.88 v28.96,103.89 27.24,105.6 21.02,105.6 v20.96,105.54 | v35.69,117.09 v35.69,108.28 | v24.26,91.57 24.38,91.69 28.58,91.69 28.96,91.31
PA0
  Top 0.152: PWM-IN.1 30.1,66.2 33.93,70.03 33.93,75.97 34.42,76.45 34.93,76.96 43.11,76.96 U3.22
PA1
  Top 0.152: U$12.1 35.69,75.95 36.15,76.41 43.06,76.41 U3.23
PA2
  Top 0.152: U3.24 37.81,76.03 37.34,75.56 37.34,68.45 U$12.2
PA3
  Top 0.152: U$12.3 38.74,69.6 38.74,74.93 39.34,75.53 U3.25
PA4  (via drill 0.35)
  Top 0.152: U3.28 45.97,73.74 45.97,73.15 44.43,71.61 44.43,66.42 v44.55,66.29 | v48.39,66.29 48.54,66.14 48.54,52.17 JP2.1
  Bottom 0.152: v44.55,66.29 v48.39,66.29
PA5
  Top 0.152: U3.29 46.31,73.66 46.31,66.1 39.93,59.72 31.38,59.72 PWM-IN.3
PA6
  Top 0.152: U3.30 46.93,66.21 39.8,59.08 33.15,59.08 30.1,56.04 PWM-IN.5
PA7
  Top 0.152: JP2.2 49.56,53.7 49.56,66.19 47.43,68.32 U3.31
PA8
  Top 0.152: U3.67 58.71,83.57 80.67,83.57 81.41,82.83 JP1.14
PA9
  Top 0.152: U3.68 58.8,84.16 82.76,84.16 JP1.15
PA10
  Top 0.152: JP1.16 80.6,84.53 U3.69
PA11
  Top 0.152: U3.70 59.57,85.03 59.69,84.91 71.45,84.91 U$14.2
PA12
  Top 0.152: U3.71 59.5,85.53 59.82,85.22 69.98,85.22 71.02,86.26 71.02,86.64 72.77,88.4 U$14.1
PB0
  Top 0.152: U3.34 48.9,73.75 48.9,68.15 50.47,66.57 50.47,55.7 51.24,54.93 52.26,54.93 53.19,54 53.19,52.6 JP2.5
PB1
  Top 0.152: U3.35 49.43,68.05 50.8,66.67 50.8,57.02 54.23,53.59 JP2.6
PB2
  Top 0.152: U3.36 49.93,68.01 51.13,66.8 51.13,57.12 53.67,54.59 55.15,54.59 55.73,54 55.73,52.6 JP2.7
PB5
  Top 0.152: JP3.2 78.33,103.86 76.93,103.86 74.31,101.24 49.68,101.24 49.4,100.96 49.4,89.31 U3.91
PB6
  Top 0.152: JP3.1 73.53,101.6 49.1,101.6 48.93,101.43 U3.92
PB12
  Top 0.152: U3.51 64.19,75.53 73.15,66.57 82.96,66.57 JP1.1
PB13
  Top 0.152: JP1.2 81.28,67.69 73.48,67.69 65.23,75.95 58.77,75.95 U3.52
PB13_2
  Top 0.152: JP2.14 61.66,56.83 56.91,56.83 53.47,60.27 53.47,73.74 U3.43
PB14
  Top 0.152: U3.53 58.76,76.45 65.53,76.45 73.43,68.55 82.4,68.55 JP1.3
PB14_2
  Top 0.152: JP2.15 67.44,52.07 66.14,53.37 66.14,53.75 62.61,57.28 56.89,57.28 53.78,60.4 53.78,72.53 53.93,72.69 U3.44
PB15  (via drill 0.35)
  Top 0.152: U3.54 66.35,77.03 73.28,70.1 v78.61,70.1 | PWM-OUT.7 85.39,61.21 v83.95,61.21
  Bottom 0.152: v83.95,61.21 79.5,65.66 79.5,69.22 v78.61,70.1
PC1
  Top 0.152: U$13.1 16.82,76.63 22.16,76.63 24.88,79.35 31.9,79.35 32.46,79.91 43.06,79.91 U3.16
PC2
  Top 0.152: U$13.2 19.04,76.32 22.28,76.32 24.88,78.92 31.9,78.92 32.51,79.53 U3.17
PC3
  Top 0.152: U$13.3 21.08,75.82 22.86,75.82 25.53,78.49 31.89,78.49 32.44,79.03 U3.18
PC4
  Top 0.152: JP2.3 50.9,52.35 50.9,54.33 49.86,55.37 49.86,66.32 47.93,68.25 U3.32
PC5
  Top 0.152: JP2.4 52.07,53.59 50.17,55.5 50.17,66.45 48.43,68.19 U3.33
PC6  (via drill 0.35)
  Top 0.152: v76.33,78.99 73.79,81.53 U3.63 | PWM-OUT.3 76.33,60.12 v76.33,65.02
  Bottom 0.152: v76.33,65.02 v76.33,78.99
PC7
  Top 0.152: U3.64 79.25,82.03 79.65,81.63 79.65,79.98 80.36,79.27 82.96,79.27 JP1.11
PC8
  Top 0.152: U3.65 58.69,82.55 79.17,82.55 81.41,80.31 JP1.12
PC9
  Top 0.152: U3.66 58.7,83.06 79.22,83.06 80.47,81.81 82.95,81.81 JP1.13
PC10
  Top 0.152: JP3.13 77.22,90.17 74.34,93.05 56.45,93.05 55.92,92.52 U3.78
PC11
  Top 0.152: U3.79 55.43,93.16 55.89,93.62 75.03,93.62 76.93,91.72 77.75,91.72 78.74,92.71 JP3.12
PC12
  Top 0.152: JP3.11 75.69,94.36 55.12,94.36 54.93,94.17 U3.80
PD0  (via drill 0.35)
  Top 0.152: U3.81 54.43,94.81 56.01,96.39 v56.01,96.62 | v36.96,96.77 20.96,96.77 INT.TP 19.18,99.06 16.36,101.88 U1.14
  Bottom 0.152: v36.96,96.77 55.86,96.77 v56.01,96.62
PD1  (via drill 0.35)
  Top 0.152: U3.82 53.93,97.49 54.48,98.04 v71.25,98.04 | v71.12,103.12 72.26,104.26 72.26,107.57 TP1.TP 71.25,108.81 BMP390.7
  Bottom 0.152: v71.12,103.12 71.12,98.17 v71.25,98.04
PD2
  Top 0.152: JP3.8 78.74,97.79 77.75,96.8 76.93,96.8 74.9,98.83 54.76,98.83 53.43,97.5 U3.83
PD3
  Top 0.152: JP3.7 75.95,99.19 54.56,99.19 52.93,97.56 U3.84
PD4
  Top 0.152: JP3.6 78.89,99.34 76.93,99.34 76.78,99.49 54.3,99.49 52.43,97.62 U3.85
PD5
  Top 0.152: JP3.5 77.22,100.2 54.46,100.2 51.93,97.67 U3.86
PD6
  Top 0.152: JP3.4 78.33,101.32 76.93,101.32 76.12,100.51 54.2,100.51 51.43,97.73 U3.87
PD7
  Top 0.152: JP3.3 75.31,100.84 53.98,100.84 50.87,97.73 50.87,89.35 U3.88
PD8
  Top 0.152: JP1.4 80.64,70.87 73.28,70.87 66.68,77.47 58.74,77.47 U3.55
PD9
  Top 0.152: U3.56 58.73,77.98 66.73,77.98 73.15,71.55 82.86,71.55 JP1.5
PD10
  Top 0.152: JP1.6 72.49,72.64 66.6,78.53 U3.57
PD11
  Top 0.152: JP1.7 82.68,73.91 71.78,73.91 66.66,79.03 U3.58
PD12  (via drill 0.35)
  Top 0.152: PWM-IN.7 37.57,58.55 40.13,58.55 42.8,61.21 v47.12,61.21 | v73.79,75.18 73.79,75.82 70.07,79.53 U3.59
  Bottom 0.152: v47.12,61.21 69.6,61.21 73.79,65.41 v73.79,75.18
PD13
  Top 0.152: JP1.8 75.29,75.18 70.44,80.03 U3.60
PD14
  Top 0.152: U3.61 70.37,80.53 74.17,76.73 82.96,76.73 JP1.9
PD15
  Top 0.152: U3.62 70.3,81.03 73.61,77.72 JP1.10
PE2
  Top 0.152: U$1.1 40.89,91.44 40.89,87.76 41.12,87.53 U3.1
PE3
  Top 0.152: U$1.2 39.62,90.17 39.62,88.52 41.11,87.03 U3.2
PE4
  Top 0.152: U$1.3 40.72,86.53 U3.3
PE5  (via drill 0.35)
  Top 0.152: v57.28,68.83 67.82,68.83 70.49,66.17 77.98,66.17 82.68,61.47 PWM-OUT.5 | v39.37,84.07 39.37,85.47 39.94,86.03 U3.4
  Bottom 0.152: v57.28,68.83 56.9,69.22 56.9,70.36 56.32,70.93 39.94,70.93 38.86,72.01 38.86,83.57 v39.37,84.07
PE6
  Top 0.152: U$1.4 37.72,83.57 37.97,83.31 40,83.31 40.13,83.44 40.13,84.2 41.47,85.53 U3.5
PE7
  Top 0.152: U3.37 50.42,67.94 51.44,66.93 51.44,57.25 53.8,54.89 55.27,54.89 56.57,53.59 JP2.8
PE8
  Top 0.152: JP2.9 58.27,52.6 58.27,54 57.08,55.19 53.92,55.19 51.74,57.38 51.74,67.21 50.93,68.02 U3.38
PE9  (via drill 0.35)
  Top 0.152: v56.01,59.94 71.37,59.94 72.5,58.82 PWM-OUT.1 | U3.39 51.55,73.66 51.55,67.83 52.25,67.13 52.25,58.62 v53.47,57.4
  Bottom 0.152: v53.47,57.4 v56.01,59.94
PE10
  Top 0.152: JP2.11 60.81,52.6 60.81,54 59.21,55.6 56.85,55.6 52.56,59.89 52.56,67.38 51.93,68.01 U3.40
PE11
  Top 0.152: U3.41 52.55,73.66 52.55,67.82 52.86,67.51 52.86,60.02 56.86,56.02 59.93,56.02 JP2.12
PE12
  Top 0.152: JP2.13 63.35,52.6 63.35,54 61.03,56.33 56.99,56.33 53.17,60.15 53.17,67.64 52.93,67.87 U3.42
PE15
  Top 0.152: JP2.16 63.44,57.59 57.01,57.59 54.43,60.18 54.43,65.67 54.08,66.02 54.08,72.41 54.43,72.76 U3.45
RXD  (via drill 0.35)
  Top 0.152: U3.97 46.5,89.36 46.5,100.43 v46.36,100.58 | v42.04,100.58 37.17,100.58 36.43,101.33 36.43,105.81 LORA.3
  Bottom 0.152: v42.04,100.58 v46.36,100.58
SCL  (via drill 0.35)
  Top 0.152: R13.1 22.48,104.9 22.99,104.39 22.99,101.85 22,100.86 22,100.61 | v54.86,70 54.93,70.06 U3.46 | v32.89,97.79 SCL0.TP 24.81,97.79 22,100.61 | U1.19 17.59,105.02 22,100.61
  Bottom 0.152: v32.89,97.79 31.5,96.39 31.5,90.17 36.32,85.34 36.32,70.94 36.64,70.62 43.57,70.62 44.2,70 v54.86,70
SCL1  (via drill 0.35)
  Top 0.152: 67.56,111.51 R8.2 63.12,111.51 62.1,110.49 SCL1.TP 61.85,103.63 v49.02,103.63 | 67.56,111.51 | 67.56,111.51 68.2,112.14 69.09,112.14 69.6,111.63 BMP390.2 | U3.95 47.43,102.31 46.86,102.87 v46.86,103.38
  Bottom 0.152: v49.02,103.63 47.12,103.63 v46.86,103.38
SDA1
  Top 0.152: U3.93 48.43,101.89 48.69,102.16 67.62,102.16 SDA1.TP 68.58,106.81 R7.2 66.65,108.99 66.65,109.87 67.52,110.74 BMP390.4
SDA/BNO  (via drill 0.35)
  Top 0.152: R5.1 17.15,106.09 U1.20 18.15,105.8 v21.65,102.3 | v55.75,68.83 55.88,68.96 55.88,72.21 55.43,72.67 U3.47 | v23.5,100.46 23.75,100.2 SDA0.TP v32.51,100.2
  Bottom 0.152: v23.5,100.46 23.37,100.46 21.59,102.23 v21.65,102.3 | v32.51,100.2 32.51,99.06 30.61,97.16 30.61,89.53 35.18,84.96 35.18,70.23 36.1,69.32 41.18,69.32 41.66,68.83 v55.75,68.83
SW
  Top 0.305: C34.1 10.44,27.61 L1.1 13.31,27.58 13.59,27.3 U$55.2
TCK/SWCLK  (via drill 0.35)
  Top 0.152: JTAG.9 28.07,116.2 29.84,114.43 v44.83,114.43 | v47.12,108.2 v58.55,108.2 | v58.93,91.69 58.93,91.28 U3.76
  Bottom 0.152: v44.83,114.43 45.85,113.41 45.85,109.47 v47.12,108.2 | v58.55,108.2 58.93,107.82 v58.93,91.69
TDI  (via drill 0.35)
  Top 0.152: JTAG.5 22.99,117.48 27.9,112.58 47.04,112.58 49.02,114.55 v49.66,114.55 | v57.28,91.69 56.43,90.84 U3.77
  Bottom 0.152: v49.66,114.55 49.78,114.68 52.71,114.68 57.28,110.11 v57.28,91.69
TDO/SWO  (via drill 0.35)
  Top 0.152: JTAG.13 33.15,116.85 33.92,116.08 49.4,116.08 v52.2,113.28 | v52.2,100.33 51.69,100.33 50.43,99.07 U3.89
  Bottom 0.152: v52.2,113.28 v52.2,100.33
TMP
  Top 0.305: C34.2 12.43,28.96 U$55.6
TRST  (via drill 0.35)
  Top 0.152: JTAG.3 27.76,112.21 47.96,112.21 49.29,113.54 50.04,113.54 v50.29,113.28 | v50.29,100.33 49.91,99.95 49.91,89.3 U3.90
  Bottom 0.152: v50.29,113.28 v50.29,100.33
TSM/SWDIO  (via drill 0.35)
  Top 0.152: JTAG.7 25.53,115.82 28.34,113.01 46.74,113.01 46.74,113.03 47.12,113.41 v47.12,114.55 | U3.72 59.25,86.03 59.41,85.88 v60.58,85.88
  Bottom 0.152: v47.12,114.55 47.12,116.71 47.37,116.97 52.32,116.97 60.58,108.71 v60.58,85.88
TXD  (via drill 0.35)
  Top 0.152: v38.1,102.74 38.1,105.66 LORA.4 | v38.23,99.31 39.88,99.31 40.77,98.42 v40.77,95.5 | v45.85,95.5 45.93,95.42 U3.98
  Bottom 0.152: v40.77,95.5 v45.85,95.5 | v38.1,102.74 38.1,99.44 v38.23,99.31
V3P3  (via drill 0.35)
  Top 0.152: BMP390.10 72.02,112.63 C27.2 73.3,113.03 v74.55,113.03 | 68.2,112.52 R8.1 65.66,112.9 65.66,114.17 v66.04,114.55 | 68.2,112.52 69.47,112.52 70.1,111.89 BMP390.1 | R5.2 R4.2 21.34,108.58 R13.2 22.86,107.44 23.62,108.2 v23.62,108.46 | U3.75 61.98,87.53 63.07,88.62 C30.1 64.26,89.26 v64.26,90.04 | v25.53,75.31 25.58,75.26 C38.1 28.8,75.26 C40.2 31.88,75.29 34.63,78.04 U3.20 | 40.77,82.53 U3.11 | 40.77,82.53 34.94,82.53 34.29,83.19 v34.29,84.07 34.29,84.81 33.89,85.22 C21.1 | BOOT.3 58.17,124.16 v58.17,125.73 | LORA.1 v30.99,108.2 | v43.3,69.97 43.93,70.6 43.93,72.38 C22.1 44.61,72.39 45.43,73.21 U3.27 | U3.50 57.16,74.02 C29.1 58.93,73.38 60.38,73.38 v61.42,72.34 | U1.28 v12.86,106.93 12.86,107.82 C24.2 | v8.25,106.81 9.21,105.85 | 9.21,105.85 9.53,105.54 R6.1 | U3.6 42.11,85.03 40.49,83.42 40.49,82.81 40.77,82.53 | BMP390.6 68.96,109.32 v68.96,108.97 68.71,108.71 R7.1 | U3.100 44.93,90.1 44.21,90.82 43.17,90.82 | C3.1 43.17,90.82 | 43.17,90.82 42.52,90.17 v42.29,90.17 | V3P3.TP 7.56,105.85 9.21,105.85 | TP3.TP 68.71,113.03 68.2,112.52 | C39.2 C23.2 28.43,73.53 29.34,73.53 | 29.34,73.53 33.22,73.53 33.57,73.88 33.57,76.55 34.43,77.41 43.06,77.41 U3.21 | 29.34,73.53 30.1,72.77 v30.1,72.52 | v12.32,101.47 12.36,101.51 U1.6 | C28.2 66.02,106.32 v66.93,105.41 | C26.2 8.53,107.59 8.25,107.31 v8.25,106.81 | v8.25,106.81 9.02,106.81 9.45,106.81 10.67,106.81 11.05,106.43 11.05,105.16 11.3,104.9 11.68,104.52 11.69,104.52 U1.3
  Top 0.305: D2.2 v18.8,44.7 | U33.5 14.37,45.79 C36.2 14.1,47.39 v14.1,49.91
  pour VDD: 96.65,42.16 96.65,128.52 3.94,128.52 3.94,42.16
V5  (via drill 0.35)
  Top 0.152: RF-RECIEVER.1 v42.04,37.08
  Top 0.305: v8.38,26.67 9.02,26.03 L1.2 10.41,24.53 C2A.1 C2B.1 | C33.2 14.58,31.35 R11.2 v15.88,32.64 | v15.88,32.64 | U33.1 14.54,40.81 C35.2 14.5,40.03 v13.46,38.99 | D2.1 18.8,39.75 | 18.8,39.75 v18.8,37.59 | U33.3 16.38,42.96 16.38,40.89 17.53,39.75 18.8,39.75
  pour VDD: 3.81,40.89 56.01,40.89 56.01,25.4 3.81,25.4
V14P8  (via drill 0.35)
  Top 0.152: R14.2 v29.34,22.99
  Top 0.305: U$55.3 14.54,23.29 C32.2 14.72,23.11 v16.64,23.11
  pour VDD: 2.67,1.4 2.67,24.26 97.41,24.26 97.41,1.4

## Text on the board
SilkscreenTop: GND | GND | GND | GND | GND | GND | V3P3 | TST | TDI | TSM | TCK | GND | TDO | NRST | GND | GND | GND | V3P3 | V3P3 | NRST | RXD | TXD | GND | PB6 | PB5 | PD7 | PD6 | PD5 | PD4 | PD3 | PD2 | X | X | PE2 | PC12 | PC11 | PE3 | PC10 | X | PE4 | PE6 | PA10 | PA9 | PA8 | PC9 | PC8 | PC7 | PD15 | PD14 | PD13 | PD11 | PC1 | PD10 | PD9 | PC2 | PD8 | PD14 | PC3 | PD13 | PD12 | PWM1 | PA1 | PA2 | PA3 | GND | PWM2 | GND | PWM3 | GND | PE9 | GND | PC6 | GND | PE5 | GND | PB15 | GND | PWM4 | GND | PC15 | PA7 | PC5 | PA7 | PE7 | PA7 | PC11 | PA13_2 | - | PA4 | PC4 | PB0 | PB2 | PE8 | PC10 | PA12 | PC14_2 | + | V5 | GND | MARI Quadcopter CSUEB CMPE 492 | Seth Iris Canonigo | Nahom Solomon | Christopher Ruiz-Guerra | Connor Prior